# EAGLE board wrt54_relay_board (EAGLE 6.1)
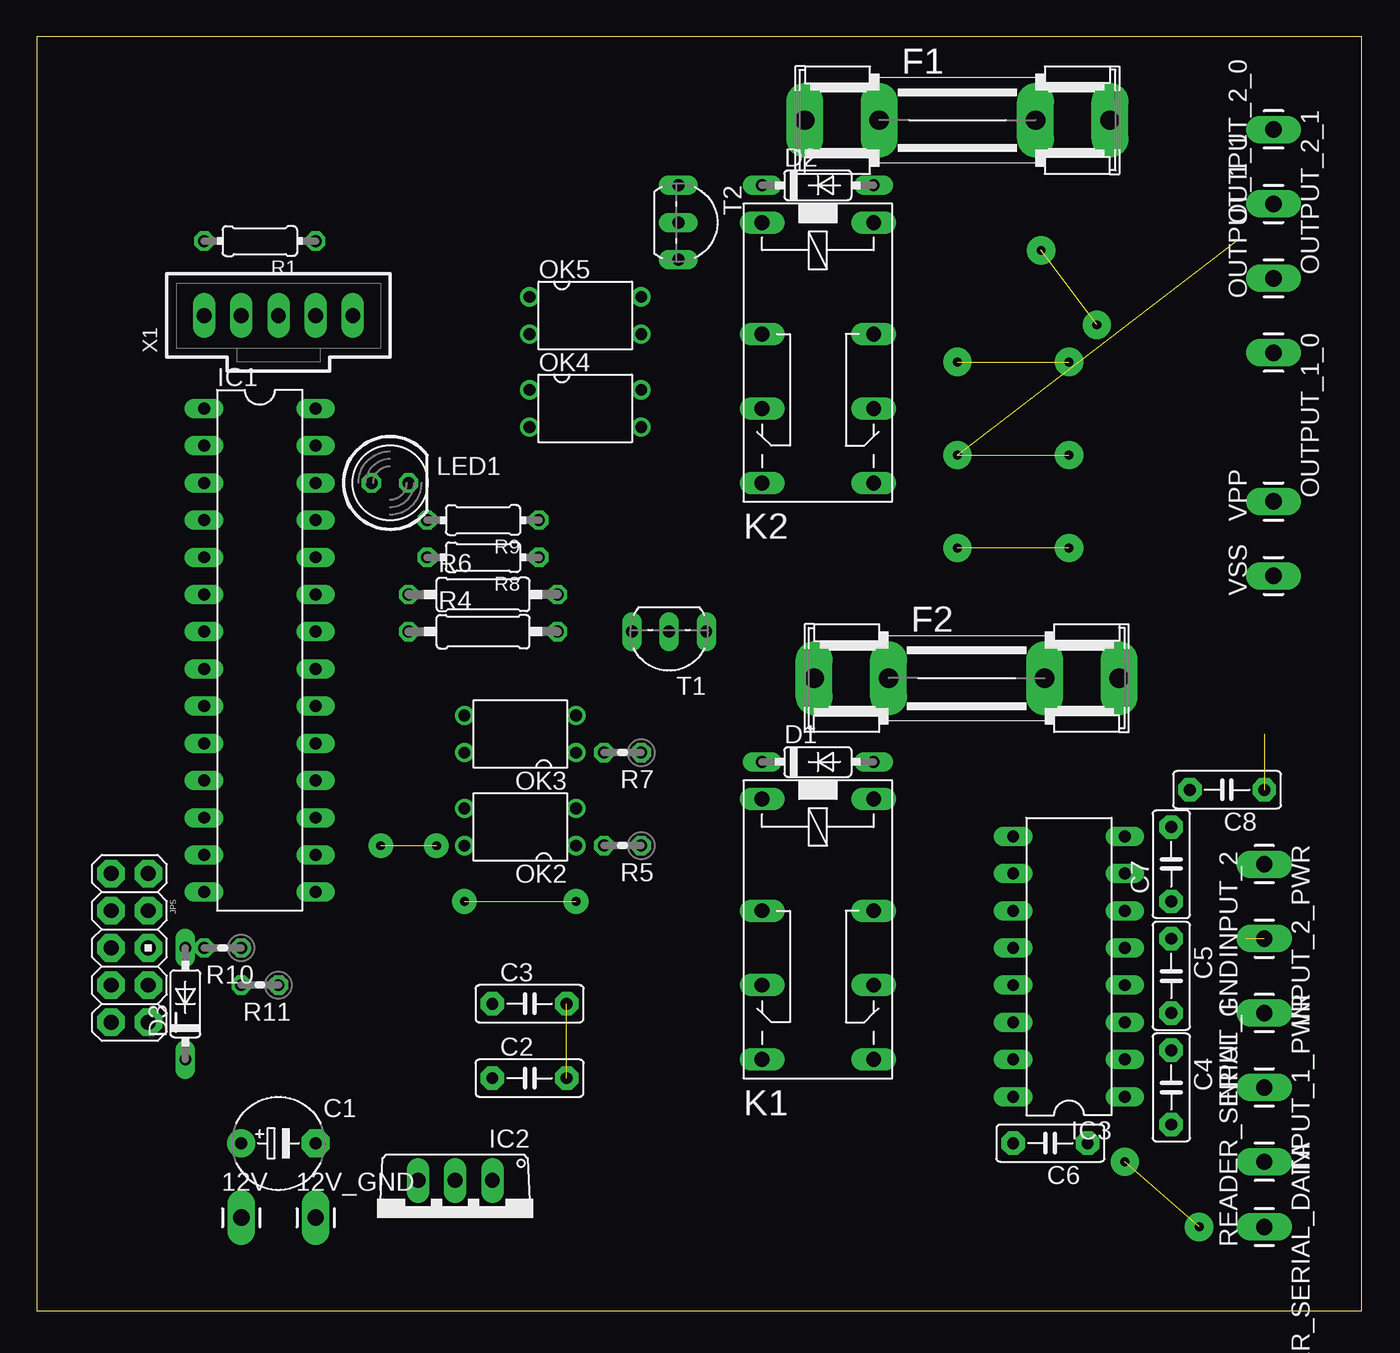
[diagram p0: board, top side]
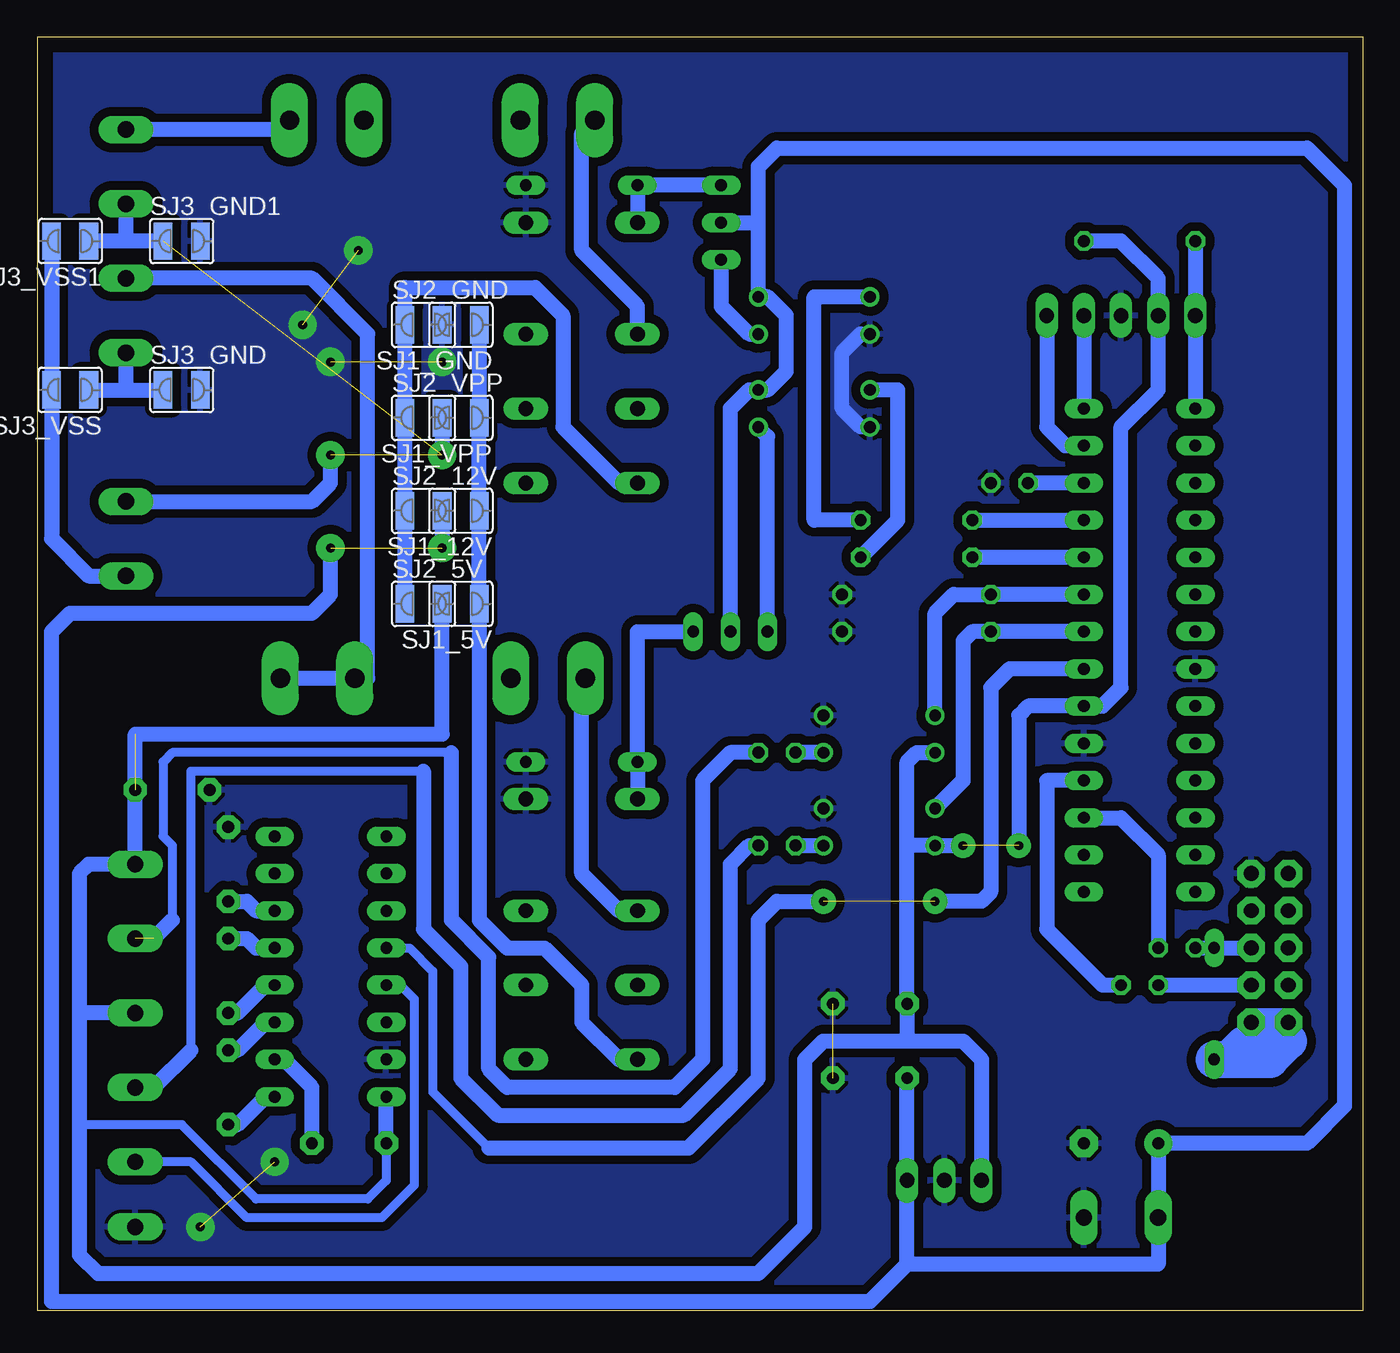
[diagram p1: board, bottom side, seen from below]

Size 90.48 x 86.99 mm. Coordinates in mm from the lower left corner, seen from the top.
Outline: 0,0 90.48,0 90.48,86.99 0,86.99 0,0
Copper layers (1*16): Top 0.035mm / dielectric 1.5mm / Bottom 0.035mm
Design rules: minimum track width 10mil, minimum drill 24mil, track to track 8mil, track to pad 8mil, pad to pad 8mil, via to via 8mil, smd to smd 8mil, copper to edge 40mil, drill to drill 8mil, minimum pad ring 10mil, minimum via ring 8mil, stop-mask expansion 4mil, vias tented up to drill 0mil, thermal gap 10mil
Net classes: 1 power: width 1.676 mm, clearance 0.508 mm

## Footprints (pad centres in the part's own frame; a part is rotated, then mirrored left to right if it is on the bottom)
1X01_LONGPAD = drill 1.118 pad 1.88 long: 1 0,0
E5-6 = drill 0.813 pad 1.905: + -2.54,0 | drill 0.813 pad 1.905 octagon: - 2.54,0
C5B2.5 = drill 0.813 pad 1.6 octagon: 1 -2.54,0; 2 2.54,0
DO35-7 = drill 0.813 long: A 3.81,0; C -3.81,0
SHK20L = drill 1.321 pad 2.54 long: 1A -10.414,0; 1B -5.334,0; 2A 10.414,0; 2B 5.334,0
DIL28 = drill 0.813 long: 1 -16.51,-3.81; 2 -13.97,-3.81; 3 -11.43,-3.81; 4 -8.89,-3.81; 5 -6.35,-3.81; 6 -3.81,-3.81; 7 -1.27,-3.81; 8 1.27,-3.81; 9 3.81,-3.81; 10 6.35,-3.81; 11 8.89,-3.81; 12 11.43,-3.81; 13 13.97,-3.81; 14 16.51,-3.81; 15 16.51,3.81; 16 13.97,3.81; 17 11.43,3.81; 18 8.89,3.81; 19 6.35,3.81; 20 3.81,3.81; 21 1.27,3.81; 22 -1.27,3.81; 23 -3.81,3.81; 24 -6.35,3.81; 25 -8.89,3.81; 26 -11.43,3.81; 27 -13.97,3.81; 28 -16.51,3.81
TO220V = drill 1.016 long: 1 -2.54,-2.54; 2 0,-2.54; 3 2.54,-2.54
DIL16 = drill 0.813 long: 1 -8.89,-3.81; 2 -6.35,-3.81; 3 -3.81,-3.81; 4 -1.27,-3.81; 5 1.27,-3.81; 6 3.81,-3.81; 7 6.35,-3.81; 8 8.89,-3.81; 9 8.89,3.81; 10 6.35,3.81; 11 3.81,3.81; 12 1.27,3.81; 13 -1.27,3.81; 14 -3.81,3.81; 15 -6.35,3.81; 16 -8.89,3.81
AVR_ICSP = drill 1.016 pad 1.88 octagon: 1 -1.27,5.08; 2 1.27,5.08; 3 -1.27,2.54; 4 1.27,2.54; 5 -1.27,0; 6 1.27,0; 7 -1.27,-2.54; 8 1.27,-2.54; 9 -1.27,-5.08; 10 1.27,-5.08
351 = drill 1.016 long: 1 -3.81,-3.81; 16 -3.81,3.81; O1 8.89,-3.81; O2 8.89,3.81; P1 3.81,-3.81; P2 3.81,3.81; S1 13.97,-3.81; S2 13.97,3.81
LED5MM = drill 0.813 octagon: A -1.27,0; K 1.27,0
DIP4 = drill 0.8: 1 -1.27,-3.81; 2 1.27,-3.81; 3 1.27,3.81; 4 -1.27,3.81
0204/7 = drill 0.813 octagon: 1 -3.81,0; 2 3.81,0
0207/10 = drill 0.813 octagon: 1 -5.08,0; 2 5.08,0
0204V = drill 0.813 octagon: 1 -1.27,0; 2 1.27,0
SJW = smd 1.27 x 2.54: 1 -1.27,0; 2 1.27,0
TO92-ECB = drill 0.813 long: B 2.54,0; C 0,0; E -2.54,0
70543-05 = drill 1.016 long: 1 -5.08,0; 2 -2.54,0; 3 0,0; 4 2.54,0; 5 5.08,0

## Placement (x,y rotation side)
12V  [1X01_LONGPAD]  13.97,6.35 0 top
12V_GND  [1X01_LONGPAD]  19.05,6.35 0 top
C1  330nF  [E5-6]  16.51,11.43 0 top
C2  330nF  [C5B2.5]  33.66,15.88 0 top
C3  100nF  [C5B2.5]  33.66,20.96 0 top
C4  100nF  [C5B2.5]  77.47,15.24 270 top
C5  100nF  [C5B2.5]  77.47,22.86 270 top
C6  100nF  [C5B2.5]  69.22,11.43 180 top
C7  100nF  [C5B2.5]  77.47,30.48 90 top
C8  100nF  [C5B2.5]  81.28,35.56 180 top
D1  1N4004  [DO35-7]  53.34,37.47 0 top
D2  1N4004  [DO35-7]  53.34,76.84 0 top
D3  1N4148  [DO35-7]  10.16,20.96 90 top
F1  [SHK20L]  62.87,81.28 0 top
F2  [SHK20L]  63.5,43.18 0 top
IC1  18F2550  [DIL28]  15.24,45.09 270 top
IC2  786TV  [TO220V]  28.57,6.35 180 top
IC3  MAX232  [DIL16]  70.48,23.5 90 top
INPUT_1  [1X01_LONGPAD]  83.82,15.24 90 top
INPUT_1_PWR  [1X01_LONGPAD]  83.82,20.32 270 top
INPUT_2  [1X01_LONGPAD]  83.82,25.4 90 top
INPUT_2_PWR  [1X01_LONGPAD]  83.82,30.48 270 top
JP5  M05X2PTH  [AVR_ICSP]  6.35,24.77 180 top
K1  351  [351]  53.34,31.12 270 top
K2  351  [351]  53.34,70.49 270 top
LED1  [LED5MM]  24.13,56.52 0 top
OK2  SFH618A-2  [DIP4]  33.02,33.02 90 top
OK3  SFH618A-2  [DIP4]  33.02,39.37 90 top
OK4  SFH618A-2  [DIP4]  37.46,61.59 270 top
OK5  SFH618A-2  [DIP4]  37.46,67.94 270 top
OUTPUT_1_0  [1X01_LONGPAD]  84.46,65.41 270 top
OUTPUT_1_1  [1X01_LONGPAD]  84.46,70.49 90 top
OUTPUT_2_0  [1X01_LONGPAD]  84.46,75.56 90 top
OUTPUT_2_1  [1X01_LONGPAD]  84.46,80.65 270 top
R1  10k  [0204/7]  15.24,73.03 180 top
R4  10k  [0207/10]  30.48,46.35 0 top
R5  150  [0204V]  40.01,31.75 180 top
R6  10k  [0207/10]  30.48,48.9 0 top
R7  150  [0204V]  40.01,38.1 180 top
R8  150  [0204/7]  30.48,51.44 180 top
R9  150  [0204/7]  30.48,53.98 180 top
R10  330  [0204V]  12.7,24.77 180 top
R11  10k  [0204V]  15.24,22.23 180 top
READER_SERIAL_DATA  [1X01_LONGPAD]  83.82,10.16 270 top
READER_SERIAL_GND  [1X01_LONGPAD]  83.82,5.71 90 top
SJ1_5V  [SJW]  61.59,48.26 180 bottom
SJ1_12V  [SJW]  61.59,54.61 180 bottom
SJ1_GND  [SJW]  61.59,67.31 180 bottom
SJ1_VPP  [SJW]  61.59,60.96 180 bottom
SJ2_5V  [SJW]  64.14,48.26 0 bottom
SJ2_12V  [SJW]  64.14,54.61 0 bottom
SJ2_GND  [SJW]  64.14,67.31 0 bottom
SJ2_VPP  [SJW]  64.14,60.96 0 bottom
SJ3_GND  [SJW]  80.65,62.87 0 bottom
SJ3_GND1  [SJW]  80.65,73.03 0 bottom
SJ3_VSS  [SJW]  88.27,62.87 180 bottom
SJ3_VSS1  [SJW]  88.27,73.03 180 bottom
T1  2STX1360  [TO92-ECB]  43.18,46.35 180 top
T2  2STX1360  [TO92-ECB]  43.81,74.29 270 top
VPP  [1X01_LONGPAD]  84.46,55.24 90 top
VSS  [1X01_LONGPAD]  84.46,50.16 90 top
X1  C-GRID-05-70543  [70543-05]  16.51,67.94 0 top

## Library data of the parts
12V 12V_GND INPUT_1 INPUT_1_PWR INPUT_2 INPUT_2_PWR JP5 OUTPUT_1_0 OUTPUT_1_1 OUTPUT_2_0 OUTPUT_2_1 READER_SERIAL_DATA READER_SERIAL_GND VPP VSS = SparkFun
C1 R1 R4-R11 = resistor
C2-C8 = capacitor-wima
D1-D3 = diode
F1 F2 = fuse; OC_FARNELL: unknown; OC_NEWARK: unknown
IC1 = pic18f2550
IC2 = linear
IC3 = maxim; MF: MAXIM; MPN: MAX232ACPE+; OC_FARNELL: 9723773; OC_NEWARK: 68K4544
K1 K2 = relay; OC_FARNELL: unknown; OC_NEWARK: unknown
LED1 = led
OK2-OK5 = optocoupler
SJ1_5V SJ1_12V SJ1_GND SJ1_VPP SJ2_5V SJ2_12V SJ2_GND SJ2_VPP SJ3_GND SJ3_GND1 SJ3_VSS SJ3_VSS1 = jumper
T1 T2 = transistor
X1 = con-molex

## Nets
+5V: C3.1 C6.2 C8.1 IC1.20 IC2.3 IC3.16 INPUT_1_PWR.1 INPUT_2_PWR.1 OK2.4 OK3.4 R1.1 SJ1_5V.2 SJ2_5V.2 X1.2
+12V: 12V.1 C1.+ C2.1 IC2.1 OK4.4 OK5.4 SJ1_12V.2 SJ2_12V.2 T1.C T2.C
GND [power]: 12V_GND.1 C1.- C2.2 C3.2 C7.2 C8.2 D1.A D2.A IC1.8 IC1.19 IC2.2 IC3.15 JP5.9 K1.16 K2.16 LED1.K OK2.2 OK3.2 OK4.2 OK5.2 R4.2 R6.2 READER_SERIAL_GND.1 SJ1_GND.2 SJ2_GND.2 SJ3_GND1.2 SJ3_GND.2 X1.3
N$1: IC1.23 OK3.3 R6.1
N$2: OK2.1 R5.2
N$3: INPUT_1.1 R5.1
N$4: IC1.22 OK2.3 R4.1
N$5: INPUT_2.1 R7.1
N$6: IC1.25 R9.2
N$7: OK5.3 T2.B
N$8: OK4.3 T1.B
N$9: IC1.28 X1.4
N$10: IC1.1 R1.2 X1.1
N$11: D2.C K2.1 T2.E
N$12: D1.C K1.1 T1.E
N$13: C4.2 IC3.1
N$14: IC1.26 LED1.A
N$15: IC1.21 IC3.12
N$16: IC3.13 READER_SERIAL_DATA.1
N$17: OK3.1 R7.2
N$18: K2.S1 SJ2_5V.1 SJ2_12V.1 SJ2_GND.1 SJ2_VPP.1
N$19: OK5.1 R9.1
N$20: K1.S1 SJ1_5V.1 SJ1_12V.1 SJ1_GND.1 SJ1_VPP.1
N$21: F1.2A OUTPUT_2_1.1
N$22: F2.2A OUTPUT_1_1.1
N$23: OUTPUT_1_0.1 SJ3_GND.1 SJ3_VSS.1
N$24: IC1.17 R10.1
N$25: IC1.18 R11.1
N$26: OUTPUT_2_0.1 SJ3_GND1.1 SJ3_VSS1.1
N$29: F1.1A K2.P1
N$30: F2.1A K1.P1
N$31: C5.2 IC3.4
N$32: C4.1 IC3.3
N$33: D3.C JP5.1 JP5.2
N$34: D3.A JP5.5 R10.2
N$35: C5.1 IC3.5
N$36: C6.1 IC3.2
N$37: C7.1 IC3.6
N$39: JP5.3 R11.2
N$44: IC1.24 R8.2
N$51: OK4.1 R8.1
N$53: IC1.27 X1.5
VPP: SJ1_VPP.2 SJ2_VPP.2 VPP.1
VSS: SJ3_VSS1.2 SJ3_VSS.2 VSS.1

## Tracks (layer width: path | path; a pad name or v marks a point on that pad's centre or on a via)
+5V  (via drill 0.6 pad 1.68)  (2 unrouted)
  Bottom 0.61: IC3.16 66.68,8.89 67.95,7.62 75.57,7.62 80.65,12.7 87.31,12.7 87.63,13.02
  Bottom 1.016: R1.1 16.51,73.03 13.97,70.49 X1.2 13.97,62.87 16.51,60.33 16.51,42.55 17.78,41.27 IC1.20 22.86,41.27 23.49,40.64 v23.49,31.75 | SJ1_5V.2 62.87,39.37 83.82,39.37 INPUT_2_PWR.1 87,30.48 87.63,29.84 87.63,20.32 | 31.11,31.75 C3.1 31.11,18.41 | 31.11,31.75 31.11,37.47 30.48,38.1 OK3.4 | 31.11,31.75 OK2.4 27.3,31.75 | 87.63,20.32 87.63,13.02 87.63,3.81 86.36,2.54 41.27,2.54 38.1,5.71 38.1,17.14 36.83,18.41 31.11,18.41 | INPUT_1_PWR.1 87.63,20.32 | 31.11,18.41 27.3,18.41 26.04,17.14 IC2.3 | C6.2 IC3.16
+12V  (via drill 0.6 pad 1.93)  (1 unrouted)
  Bottom 1.016: SJ1_12V.2 62.87,52.07 | 41.27,74.29 OK5.4 40.64,69.22 39.37,67.94 39.37,64.13 40.64,62.87 OK4.4 41.91,62.87 43.18,61.59 T1.C | 41.27,74.29 41.27,78.1 40.01,79.38 3.81,79.38 1.27,76.84 1.27,13.97 3.81,11.43 C1.+ 12V.1 13.97,3.18 31.11,3.18 | T2.C 41.27,74.29 | v70.48,52.07 70.48,48.9 71.76,47.62 88.27,47.62 89.54,46.35 89.54,0.64 33.66,0.64 31.11,3.18 | 31.11,3.18 IC2.1 C2.1
GND  (via drill 0.6 pad 1.93)  (4 unrouted)
  Bottom 1.016: OK4.2 34.29,60.33 35.56,61.59 35.56,65.41 34.29,66.67 OK5.2
  other vias: 70.48,64.77 62.87,64.77 68.58,72.39 72.39,67.31 79.38,5.71 74.3,10.16
  pour Bottom (isolate 0.61): 0.64,85.72 89.54,85.72 89.54,0 0.64,0
N$1
  Bottom 1.016: IC1.23 R6.1 27.94,48.9 29.21,47.62 OK3.3
N$2
  Bottom 1.016: R5.2 OK2.1
N$3
  Bottom 0.61: 80.01,17.78 80.01,36.83 64.14,36.83
  Bottom 1.016: INPUT_1.1 82.55,15.24 80.01,17.78 | 64.14,36.83 64.14,26.04 61.59,23.5 61.59,15.88 59.05,13.34 46.35,13.34 43.18,16.51 43.18,30.48 41.91,31.75 R5.1
N$4
  Bottom 1.016: IC1.22 R4.1 26.67,46.35 27.3,45.72 27.3,36.2 OK2.3
N$5  (1 unrouted)
  Bottom 0.61: 62.23,38.1 81.28,38.1 81.92,37.47 81.92,32.39 81.28,31.75 81.28,26.67
  Bottom 1.016: R7.1 43.18,38.1 45.09,36.2 45.09,17.14 46.99,15.24 58.42,15.24 59.69,16.51 59.69,24.13 62.23,26.67 62.23,38.1 | 81.28,26.67 82.55,25.4
N$6
  Bottom 1.016: R9.2 IC1.25
N$7
  Bottom 1.016: T2.B 43.81,68.58 41.91,66.67 OK5.3
N$8
  Bottom 1.016: T1.B 40.64,59.69 OK4.3
N$9
  Bottom 1.016: X1.4 IC1.28
N$10
  Bottom 1.016: R1.2 X1.1 IC1.1
N$11
  Bottom 1.016: T2.E D2.C K2.1
N$12
  Bottom 1.016: K1.1 D1.C 49.53,46.35 T1.E
N$13
  Bottom 1.016: C4.2 76.84,12.7 74.93,14.61 IC3.1
N$14
  Bottom 1.016: IC1.26 LED1.A
N$15  (via drill 0.6 pad 1.68)  (1 unrouted)
  Bottom 0.61: IC3.12 65.09,24.77 63.5,23.18 63.5,14.92 59.69,11.11
  Bottom 1.016: 59.69,11.11 46.04,11.11 41.27,15.88 41.27,26.67 40.01,27.94 v36.83,27.94 | IC1.21 24.13,43.81 25.4,42.55 25.4,28.57 26.04,27.94 v29.21,27.94
N$16
  Bottom 0.61: IC3.13 65.72,22.23 64.77,21.27 64.77,8.57 66.99,6.35 76.2,6.35 80.01,10.16 READER_SERIAL_DATA.1
N$17
  Bottom 1.016: OK3.1 R7.2
N$18
  Bottom 1.016: SJ2_5V.1 SJ2_12V.1 SJ2_VPP.1 SJ2_GND.1 65.41,69.85 56.52,69.85 54.61,67.94 54.61,60.33 50.8,56.52 K2.S1
N$19
  Bottom 1.016: R9.1 37.46,53.98 37.46,69.22 OK5.1
N$20
  Bottom 1.016: SJ1_GND.1 SJ1_VPP.1 SJ1_12V.1 SJ1_5V.1 60.32,26.67 58.42,24.77 55.88,24.77 53.34,22.23 53.34,19.69 50.8,17.14 K1.S1
N$21
  Bottom 1.016: F1.2A 73.28,81.03 73.66,80.65 OUTPUT_2_1.1
N$22
  Bottom 1.016: F2.2A 67.95,43.18 67.95,66.67 71.76,70.49 OUTPUT_1_1.1
N$23
  Bottom 1.016: SJ3_VSS.1 84.46,62.87 | 84.46,62.87 SJ3_GND.1 | OUTPUT_1_0.1 84.46,62.87
N$24
  Bottom 1.016: IC1.17 16.51,33.66 13.97,31.12 R10.1
N$25
  Bottom 1.016: IC1.18 21.59,36.2 21.59,26.04 17.78,22.23 R11.1
N$26  (via drill 0.6 pad 1.93)  (1 unrouted)
  Bottom 1.016: SJ3_GND1.1 84.46,73.03 | 84.46,73.03 SJ3_VSS1.1 | OUTPUT_2_0.1 84.46,73.03
  other vias: 62.87,58.42
N$27  (via drill 0.6 pad 1.93)
  other vias: 70.48,58.42
N$28  (via drill 0.6 pad 1.93)
  other vias: 62.87,52.07
N$29
  Bottom 1.016: K2.P1 49.53,68.58 53.34,72.39 53.34,80.39 F1.1A
N$30
  Bottom 1.016: K1.P1 50.8,27.3 53.34,29.84 53.34,42.93 F2.1A
N$31
  Bottom 1.016: C5.2 76.84,20.32 74.93,22.23 IC3.4
N$32
  Bottom 1.016: C4.1 76.84,17.78 74.93,19.69 IC3.3
N$33
  Bottom 1.93: JP5.1 JP5.2 6.35,19.69 8.25,17.78 8.25,18.41 9.53,17.14
  Bottom 2.54: D3.C 9.53,17.14 6.35,17.14 5.08,18.41
N$34
  Bottom 1.016: R10.2 D3.A JP5.5
N$35
  Bottom 1.016: C5.1 76.2,25.4 75.57,24.77 IC3.5
N$36
  Bottom 1.016: C6.1 71.76,15.24 73.66,17.14 IC3.2
N$37
  Bottom 1.016: C7.1 76.2,27.94 75.57,27.3 IC3.6
N$38  (via drill 0.6 pad 1.68)
  other vias: 27.3,31.75
N$39
  Bottom 1.016: R11.2 JP5.3
N$44
  Bottom 1.016: IC1.24 R8.2
N$51
  Bottom 1.016: R8.1 31.75,53.98 31.75,62.87 OK4.1
N$53
  Bottom 1.016: X1.5 21.59,60.33 20.32,59.05 IC1.27
VPP  (1 unrouted)
  Bottom 1.016: VPP.1 71.76,55.24 70.48,56.52 70.48,58.42 | SJ1_VPP.2 62.87,58.42
VSS
  Bottom 1.016: VSS.1 87,50.16 89.54,52.7 SJ3_VSS.2 SJ3_VSS1.2